# EAGLE board board-beta1.2v (EAGLE 7.7.0)
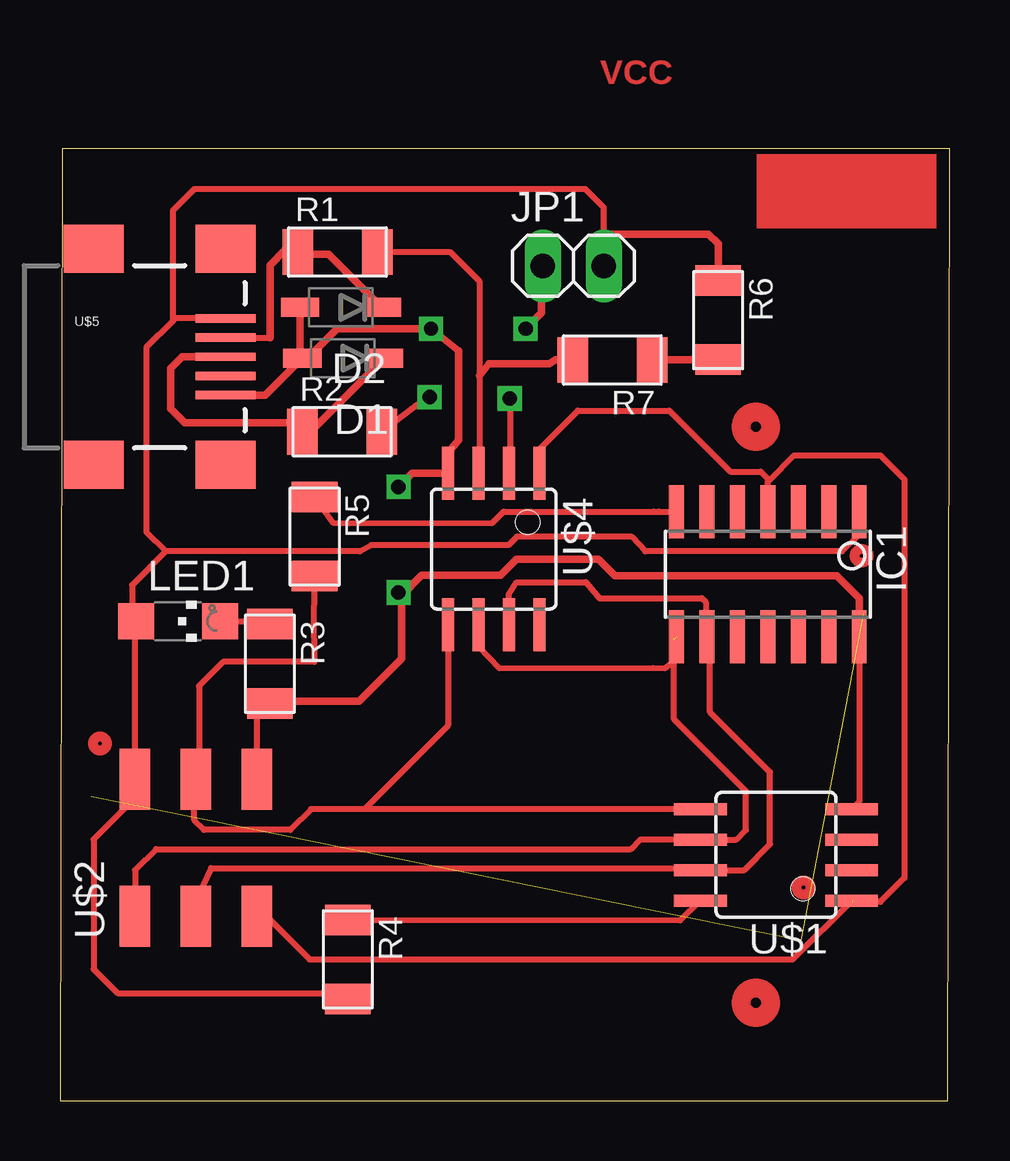
[diagram p0: board, top side]
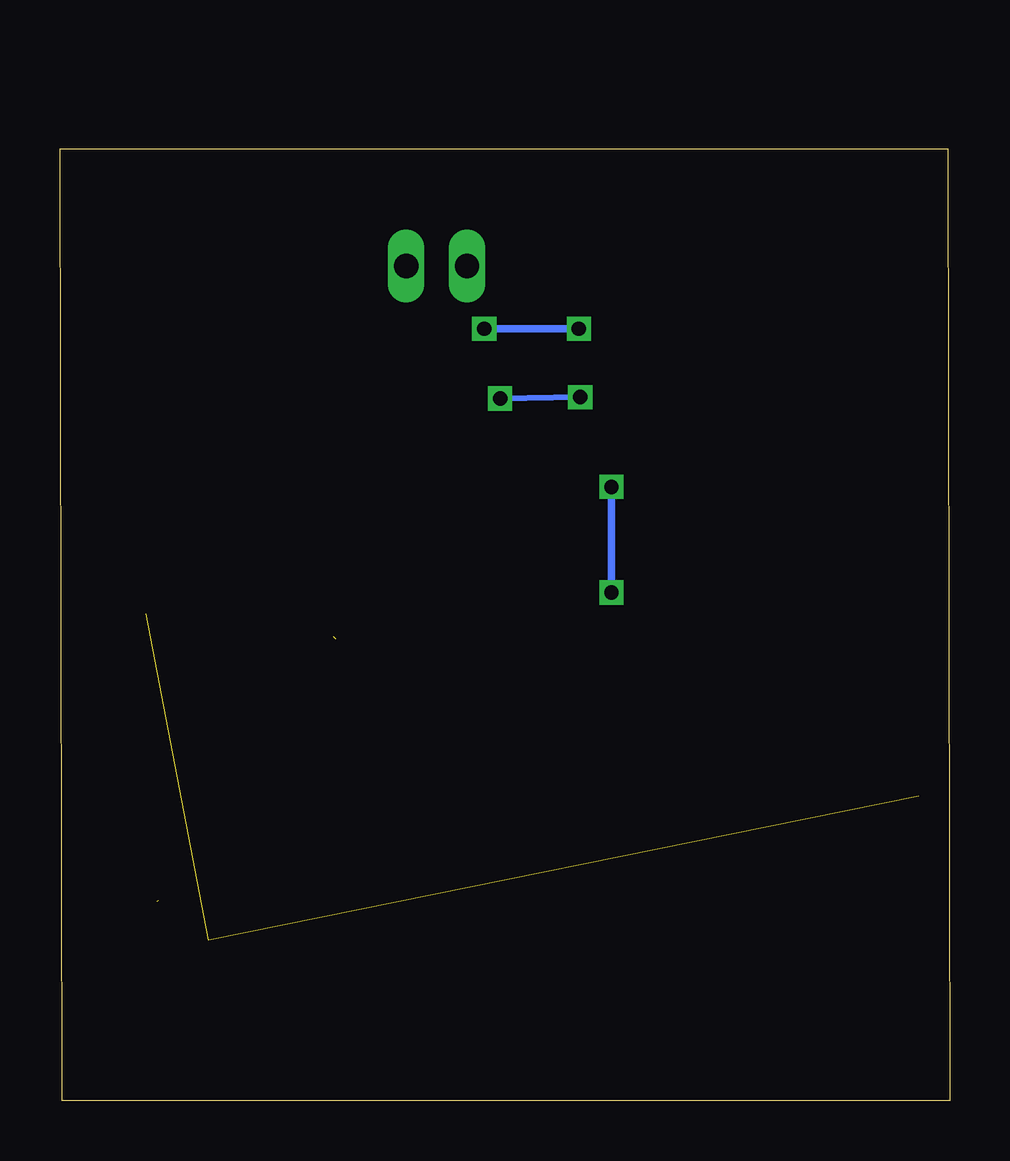
[diagram p1: board, bottom side, seen from below]

Size 37.1 x 39.66 mm. Coordinates in mm from the lower left corner, seen from the top.
Outline: 0,0 37,0 37.1,39.66 0.1,39.66 0,0
Copper layers (1*16): Top 0.035mm / dielectric 1.5mm / Bottom 0.035mm
Design rules "board12_1_3_5v *": minimum track width 10mil, minimum drill 24mil, track to track 8mil, track to pad 8mil, pad to pad 8mil, via to via 8mil, smd to smd 8mil, copper to edge 40mil, drill to drill 8mil, minimum pad ring 10mil, minimum via ring 8mil, stop-mask expansion 4mil, vias tented up to drill 0mil, thermal gap 10mil

## Footprints (pad centres in the part's own frame; a part is rotated, then mirrored left to right if it is on the bottom)
SOD123 = smd 1.6 x 0.8: ANODE 1.7,0; CATHODE -1.7,0
SOIC14 = smd 0.61 x 2.21: 1 -3.81,-2.603; 2 -2.54,-2.603; 3 -1.27,-2.603; 4 0,-2.603; 5 1.27,-2.603; 6 2.54,-2.603; 7 3.81,-2.603; 8 3.81,2.603; 9 2.54,2.603; 10 1.27,2.603; 11 0,2.603; 12 -1.27,2.603; 13 -2.54,2.603; 14 -3.81,2.603
1X02 = drill 1.016 long: 1 -1.27,0; 2 1.27,0
CHIPLED_1206 = smd 1.5 x 1.5: A 0,-1.75; C 0,1.75
R1206FAB = smd 1.27 x 1.905: 1 -1.651,0; 2 1.651,0
SOIC8 = smd 0.5 x 2.2: 1 -1.905,-3.154; 2 -0.645,-3.154; 3 0.625,-3.154; 4 1.895,-3.154; 5 1.905,3.154; 6 0.635,3.154; 7 -0.635,3.154; 8 -1.905,3.154
2X03SMD = smd 2.54 x 1.27: 1 -2.857,2.54; 2 2.857,2.54; 3 -2.857,0; 4 2.857,0; 5 -2.857,-2.54; 6 2.857,-2.54
USB_MINIB = smd 2.5 x 0.35: D+ 3.77,0; D- 3.77,0.8; GND 3.77,-1.6; ID 3.77,-0.8; VBUS 3.77,1.6 | smd 2.5 x 2: SHIELD@1 -1.73,-4.5; SHIELD@2 -1.73,4.5; SHIELD@3 3.77,4.5; SHIELD@4 3.77,-4.5

## Placement (x,y rotation side)
D1  [SOD123]  11.8,30.93 180 top
D2  [SOD123]  11.71,33.05 180 top
IC1  ATTINY44-SSU  [SOIC14]  29.51,21.93 180 top
JP1  [1X02]  21.4,34.78 0 top
LED1  [CHIPLED_1206]  4.92,19.97 270 top
R1  49 Ω  [R1206FAB]  11.57,35.36 0 top
R2  49 Ω  [R1206FAB]  11.76,27.87 0 top
R3  449 Ω  [R1206FAB]  8.75,18.2 270 top
R4  0 Ω  [R1206FAB]  12,5.88 270 top
R5  0 Ω  [R1206FAB]  10.61,23.5 270 top
R6  49 Ω  [R1206FAB]  27.44,32.52 270 top
R7  49 Ω  [R1206FAB]  23.03,30.86 180 top
U$1  ATTINY45SI  [SOIC8]  29.85,10.24 90 top
U$2  AVRISPSMD  [2X03SMD]  5.67,10.53 90 top
U$4  ATTINY45SI  [SOIC8]  18.08,22.98 180 top
U$5  USB_MINIB  [USB_MINIB]  3.14,30.99 0 top

## Library data of the parts
D1 D2 IC1 R1-R7 U$1 U$2 U$4 U$5 = fab
JP1 = pinhead
LED1 = adafruit

## Nets
_D+: D1.CATHODE R2.1 U$5.D+
_D-: D2.CATHODE R1.1 U$5.D-
D+: R2.2 U$4.2
D-: R1.2 R7.2 U$4.3
GND: D1.ANODE D2.ANODE IC1.14 JP1.1 R3.2 U$1.4 U$2.6 U$4.4 U$5.GND
MISO: IC1.8 U$1.6 U$2.1 U$4.6
MOSI: R5.2 U$1.5 U$2.4 U$4.5
MOSI_1: IC1.7 R5.1
N$1: R4.1 U$1.8
N$3: LED1.C R3.1
N$4: U$4.8
N$5: R6.2 R7.1
RST: IC1.4 U$1.1 U$2.5 U$4.1
SCK: IC1.9 U$1.7 U$2.3 U$4.7
VCC: IC1.1 JP1.2 LED1.A R4.2 R6.1 U$2.2 U$5.VBUS

## Tracks (layer width: path | path; a pad name or v marks a point on that pad's centre or on a via)
_D+
  Top 0.305: U$5.D+ 5.09,30.99 4.61,30.51 4.61,28.83 5.2,28.24 9.74,28.24 R2.1 10.44,27.87 D1.CATHODE
_D-
  Top 0.25: U$5.D- 8.75,31.79 | 10.01,35.27 R1.1
  Top 0.305: 8.75,31.79 8.75,34.81 9.37,35.43 9.85,35.43 R1.1 | 10.01,35.27 11.19,35.27 D2.CATHODE
D+  (via drill 0.6)
  Top 0.25: R2.2 15.23,29.27 v15.41,29.31 | v18.75,29.25 18.75,26.66 U$4.2
  Bottom 0.25: v15.41,29.31 v18.75,29.25
D-
  Top 0.25: R1.2 16.25,35.36 17.48,34.13 17.48,30.19 17.48,26.76 U$4.3
  Top 0.305: R7.2 20.66,30.86 20.4,30.69 17.89,30.69 17.48,30.19
GND  (via drill 0.6)
  Top 0.25: U$2.6 8.21,16.24 R3.2 | IC1.14 33.32,12.45 U$1.4
  Top 0.305: D2.ANODE 10.01,31.02 D1.ANODE | U$5.GND 8.56,29.39 D1.ANODE | IC1.14 33.32,20.93 32.38,21.87 23.13,21.87 22.45,22.55 19.03,22.55 18.36,21.88 15.08,21.88 14.24,21.04 | 14.24,21.04 14.24,18.4 12.47,16.63 8.83,16.63 R3.2 | D1.ANODE 10.32,30.93 11.55,32.16 v15.47,32.16 16.62,31.24 16.61,27.51 16.18,26.99 U$4.4 14.67,26.13 v14.11,25.57 | v19.41,32.16 20.08,32.83 20.08,34.73 JP1.1 | v14.11,21.17 14.24,21.04
  Bottom 0.305: v15.47,32.16 v19.41,32.16 | v14.11,25.57 v14.11,21.17
MISO  (1 unrouted)
  Top 0.25: U$2.1 3.13,9.61 4,10.48 23.8,10.48 24.2,10.88 U$1.6 28.2,10.88 28.6,11.28 28.6,12.88 25.6,15.88 25.6,19.23 | U$4.6 17.45,18.93 18.32,18.02 24.73,18.03 25.22,18.02 25.69,18.37 IC1.8
MOSI
  Top 0.25: U$1.5 12.7,12.15 | 12.7,12.15 10.46,12.15 9.6,11.28 6,11.28 5.6,11.68 5.6,13.48 | 5.6,13.48 5.6,13.68 5.8,13.88 | R5.2 10.58,20.25 10.6,18.28 6.8,18.28 5.8,17.28 5.8,13.68 | 5.8,13.68 5.8,13.52 | U$2.4 5.67,13.55 | 5.67,13.55 5.8,13.68 | 5.67,13.55 5.6,13.48 | U$4.5 16.17,15.62 12.7,12.15
MOSI_1
  Top 0.25: R5.1 11.38,24.08 18,24.06 18.49,24.54 24.76,24.54 24.95,24.53 IC1.7
N$1
  Top 0.25: R4.1 25.86,7.5 U$1.8
N$2  (2 unrouted)
N$3
  Top 0.25: LED1.C 8.4,19.97 R3.1
N$5
  Top 0.305: R7.1 R6.2
RST  (1 unrouted)
  Top 0.25: U$2.5 8.61,7.67 10.4,5.88 30.55,5.88 U$1.1 | IC1.4 29.51,25.79 29.57,25.85 | 29.57,25.85 30.6,26.88 34.2,26.88 35.2,25.88 35.2,9.28 34.2,8.28 33.06,8.28 | U$4.1 19.98,27.14 21.59,28.75 25.4,28.75 27.94,26.21 29.21,26.21 29.57,25.85
SCK
  Top 0.25: U$2.3 5.67,7.61 5.8,7.48 5.8,8.22 5.67,8.35 6.3,9.68 25.92,9.68 U$1.7 28.52,9.61 29.6,10.68 29.6,13.68 27.1,16.18 27.1,19.2 IC1.9 26.9,19.4 26.92,20.78 26.76,20.93 23.1,20.92 22.49,20.92 21.92,21.6 19.04,21.59 18.71,21.1 18.71,20.49 U$4.7
VCC
  Top 0.25: 4.4,22.88 12.5,22.88 12.98,23.14 18.69,23.14 19.05,23.5 23.85,23.49 24.4,22.88 32.6,22.88 33.32,23.6 IC1.1 | 4.4,22.88 3,21.48 3,20.14 LED1.A 3.13,19.93 U$2.2 3.13,12.61 1.4,10.88 1.4,5.48 2.4,4.48 12.02,4.48 | 12.82,4.48 12.02,4.48 | 12.02,4.48 R4.2 | U$5.VBUS 4.81,32.59 4.7,32.48 | 4.7,32.48 3.6,31.38 3.6,23.68 4.4,22.88 | JP1.2 22.67,36 22.67,37.21 21.9,37.98 5.6,37.98 4.7,37.08 4.7,32.48
  Top 0.305: R6.1 27.44,35.69 27.04,36.09 22.76,36.09 22.67,36
(copper drawn outside any net)
  shapes: Top area x1, Top circle x5

## Text on the board
Top: VCC
Pads: Boot